# Altium PCB PCB1.PcbDoc
Units mm, origin at the board's own origin, x right, y up, seen from the top; angles counter-clockwise.
Board outline 120.01 x 34 mm, 2 copper layers (Top Layer, Bottom Layer); 71 components, 74 nets, 283 pads, 60 vias.
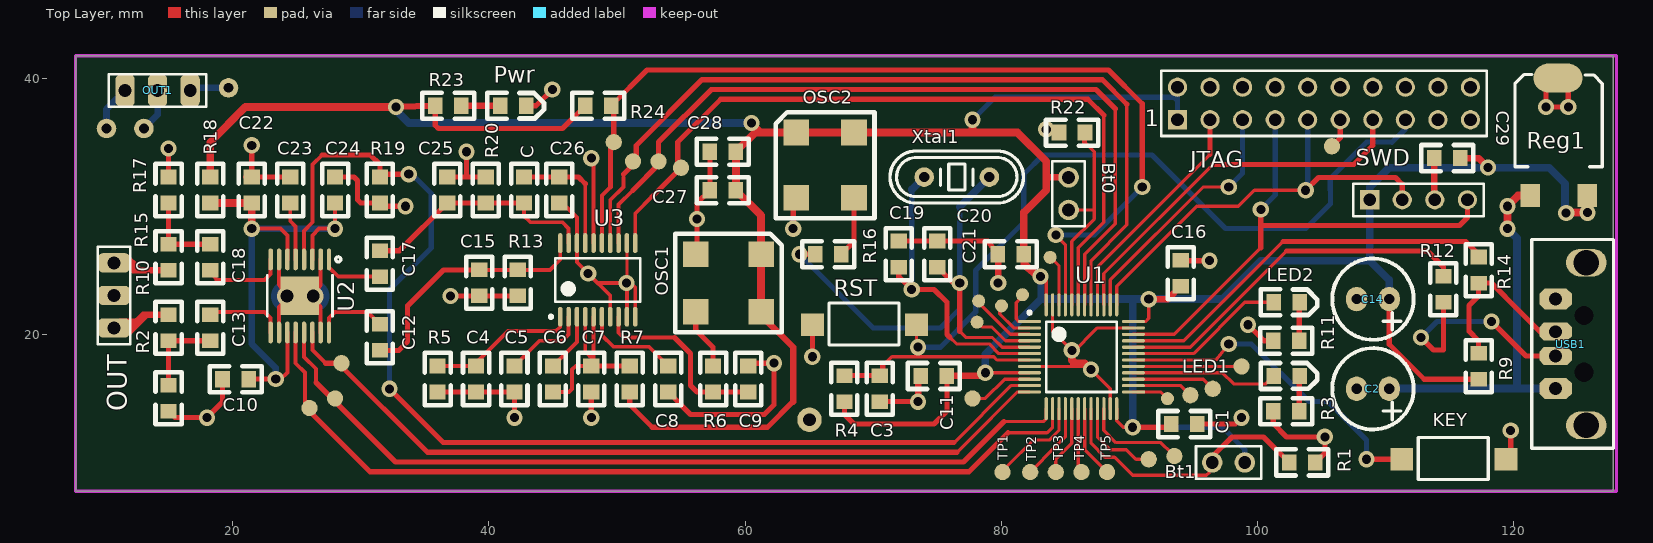
[diagram p0: Top Layer view]
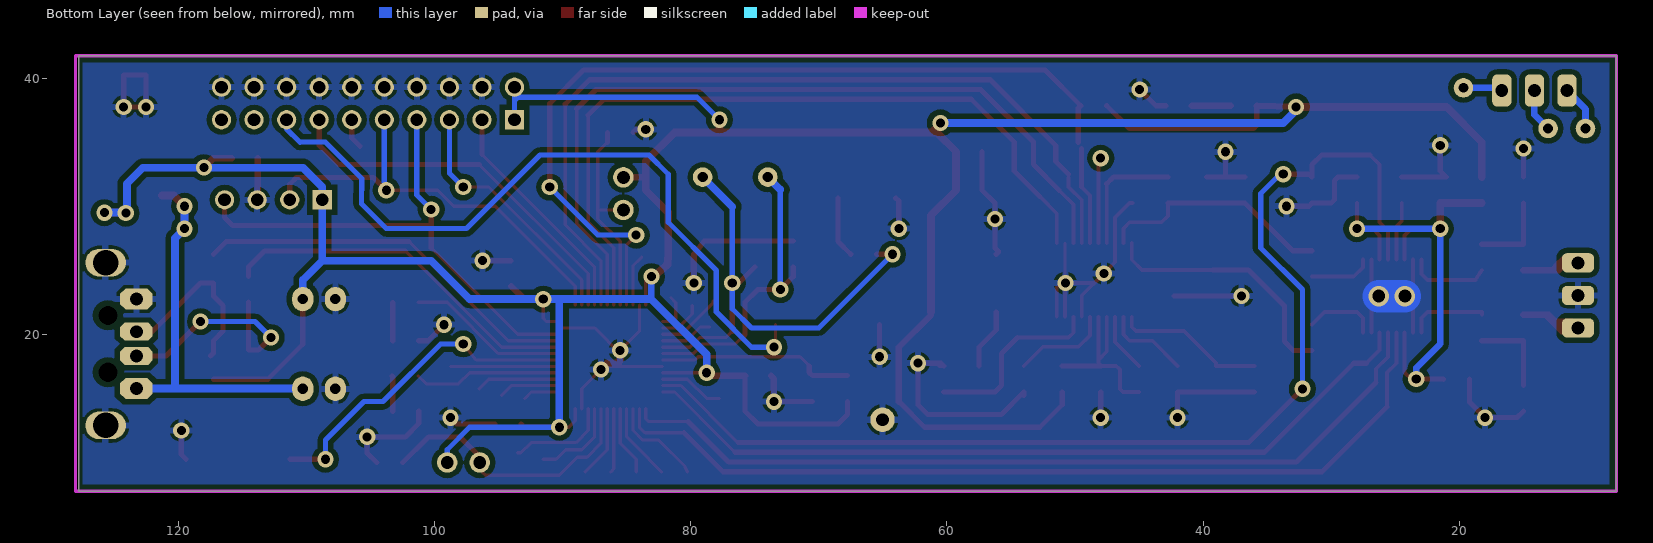
[diagram p1: Bottom Layer view, seen from below]

## Layer stack, top to bottom
Top Solder: solder mask 0.0102, Solder Resist, Dk 3.5
Top Layer: signal copper 0.0356
Dielectric 1: dielectric 0.32, FR-4, Dk 4.8
Bottom Layer: signal copper 0.0356
Bottom Solder: solder mask 0.0102, Solder Resist, Dk 3.5

## Board outline
7.75,7.75 7.75,41.75 127.762,41.75 127.762,7.75 7.75,7.75

## Design rules (kind name [scope] priority, off if disabled: settings)
Clearance [All] p1: gap=0.406 except(0.203: Track-SMDPad Track-Track SMDPad-SMDPad)
MinimumSolderMaskSliver [All] p1: minsoldermaskwidth=0
PolygonConnect [All] p1: connectstyle=Relief reliefconductorwidth=0.508 reliefentries=4 polygonreliefangle="90 Angle" airgapwidth=0.254
RoutingVias [All] p1: holewidth=0.711 width=1.27 viastyle="Through Hole" minholewidth=0.711 minwidth=1.27 maxholewidth=0.711 maxwidth=1.27
SilkToSilkClearance [All] p1: silktosilkclearance=0
SilkToSolderMaskClearance [IsPad] p1: minsilkscreentomaskgap=0 clearancetoexposedcopper=TRUE
SolderMaskExpansion [All] p1: expansion=0.102
UnpouredPolygon [All] p1: allowunpoured=FALSE
Width [All] p1: maxlimit=2.54 minlimit=0.254 preferedwidth=0.254
26 further rules are at their usual default settings.

## Components (designator, comment, footprint, x,y, rotation, side; value= is the part's Value field where it differs from the comment)
Bt0 "Comment" HDR1X2 85.25,32.25 r270 top
Bt1 "Comment" HDR1X2 99,10 r180 top
C "100nF" SMD0805 42.75,30.25 r90 top
C1 "Comment" SMD0805 93.25,13 r0 top
C2 "Comment" CAP_1.0 109,15.75 r180 top
C3 "Comment" SMD0805 70.5,14.75 r90 top
C4 "10nF" SMD0805 39,15.5 r90 top
C5 "10nF" SMD0805 42,15.5 r90 top
C6 "10nF" SMD0805 45,15.5 r90 top
C7 "100nF" SMD0805 48,15.5 r90 top
C8 "100nF" SMD0805 54,15.5 r90 top
C9 "15pF" SMD0805 60.25,15.5 r90 top
C10 "Comment" SMD0805 21.25,16.5 r180 top
C11 "Comment" SMD0805 75.75,16.75 r180 top
C12 "Comment" SMD0805 31.5,18.75 r90 top
C13 "Comment" SMD0805 18.25,19.5 r90 top
C14 "Comment" CAP_1.0 109,22.75 r180 top
C15 "22pF" SMD0805 39.25,23 r90 top
C16 "Comment" SMD0805 94,23.75 r90 top
C17 "Comment" SMD0805 31.5,24.5 r90 top
C18 "Comment" SMD0805 18.25,25 r90 top
C19 "Comment" SMD0805 72,25.25 r90 top
C20 "Comment" SMD0805 75,25.25 r90 top
C21 "Comment" SMD0805 81.75,26.25 r180 top
C22 "Comment" SMD0805 21.5,30.25 r90 top
C23 "Comment" SMD0805 24.5,30.25 r90 top
C24 "Comment" SMD0805 28,30.25 r90 top
C25 "22pF" SMD0805 36.75,30.25 r90 top
C26 "100pF" SMD0805 45.5,30.25 r90 top
C27 "Comment" SMD0805 57.25,31.25 r0 top
C28 "Comment" SMD0805 57.25,34.25 r0 top
C29 "Comment" SMD0805 113.793,33.762 r0 top
JTAG "Comment" HDR2X10 93.75,36.75 r0 top
KEY "Comment" MicroSW_smd 111.25,10.25 r0 top
LED1 "Comment" LED805 101.25,16.75 r0 top
LED2 "Comment" LED805 101.25,22.5 r0 top
OSC1 "Comment" OSC 61.25,26.25 r180 top
OSC2 "Comment" OSC 64,35.75 r270 top
OUT "Comment" HDR1X3 10.75,20.5 r90 top
OUT1 "Comment" HDR1X3 11.61,39.034 r0 top
Pwr "Comment" LED805 40.894,37.846 r0 top
R1 "Comment" SMD0805 104.5,10 r180 top
R2 "Comment" SMD0805 15,14 r90 top
R3 "Comment" SMD0805 103.25,14 r180 top
R4 "Comment" SMD0805 67.75,14.75 r90 top
R5 "6K8" SMD0805 36,15.5 r90 top
R6 "100R" SMD0805 57.5,15.5 r90 top
R7 "10R" SMD0805 51,15.5 r90 top
R9 "1K5" SMD0805 117.25,16.5 r90 top
R10 "Comment" SMD0805 15,19.5 r90 top
R11 "Comment" SMD0805 103.25,19.5 r180 top
R12 "22R" SMD0805 114.5,22.5 r90 top
R13 "220R" SMD0805 42.25,23 r90 top
R14 "22R" SMD0805 117.25,24 r90 top
R15 "Comment" SMD0805 15,25 r90 top
R16 "Comment" SMD0805 67.5,26.25 r180 top
R17 "Comment" SMD0805 15,30.25 r90 top
R18 "Comment" SMD0805 18.25,30.25 r90 top
R19 "Comment" SMD0805 31.5,30.25 r90 top
R20 "220R" SMD0805 39.75,30.25 r90 top
R22 "Comment" SMD0805 84.5,35.75 r0 top
R23 "Comment" SMD0805 35.814,37.846 r0 top
R24 "Comment" SMD0805 47.522,37.847 r0 top
Reg1 "Comment" DPAK 123.5,40.25 r0 top
RST "Comment" MicroSW_smd 65.25,20.75 r0 top
SWD "Comment" HDR1X4 108.75,30.5 r0 top
U1 "Comment" STM-LQFP48_N 86.25,18.25 r0 top
U2 "Comment" ADI-RE-16-2_N 25.25,23 r270 top
U3 "Comment" ADI-RU-20_N 48.5,24.25 r90 top
USB1 "Comment" usb_female 123.25,19.25 r90 top
Xtal1 "Comment" XTAL2 75.25,30.75 r0 top

## Footprints (in the part's own frame and the unit in brackets; to place one, negate y for a bottom-side part, rotate by r counter-clockwise, add the part's x,y. Pads: shape width x height; smd on the part's side, far side on the other; paste and mask are expansions set on the pad)
ADI-RE-16-2_N [mm] "TSOP, 16-Leads, Body 5x4.4mm, Pitch 0.65mm, Thermal Pad, IPC Medium Density"
  rect 3x3 smd paste-1.5: 17(0,0)
  oval 1.7x0.35 smd: CLK(2.85,0.325) Data(2.85,0.975) ICOM(-2.85,1.625) ICOM(2.85,1.625) IN+(-2.85,2.275) IN-(2.85,2.275) Latch(2.85,-0.325) OCM(2.85,-1.625) OCOM(-2.85,-1.625) OUT+(-2.85,-2.275) OUT-(2.85,-2.275) PwUp(-2.85,0.325) VCCI(-2.85,0.975) VCCO(-2.85,-0.975) VCCO(2.85,-0.975) VOCM(-2.85,-0.325)
  silkscreen extent -3.05,-2.55 1.6,3.2, body extent -2.25,-2.55 2.25,2.55, height 1.2
ADI-RU-20_N [mm] "SOP, 20-Leads, Body 6.5x4.4mm, Pitch 0.65mm, IPC Medium Density"
  oval 1.55x0.35 smd: AGND(2.875,1.625) AVdd(-2.875,0.975) Cap(-2.875,-0.325) Comp(-2.875,1.625) DGND(-2.875,-0.975) DVdd(-2.875,0.325) Fadj(-2.875,2.925) Fsel(-2.875,-2.275) Fsync(2.875,-0.325) Iout(2.875,2.275) IoutB(2.875,2.925) MCLK(-2.875,-1.625) Psel(-2.875,-2.925) RefOut(-2.875,2.275) Reset(2.875,-2.925) SCLK(2.875,-0.975) Sdata(2.875,-1.625) Sign(2.875,0.325) Sleep(2.875,-2.275) Vin(2.875,0.975)
  silkscreen extent -3,-3.3 1.7,3.77, body extent -2.25,-3.3 2.25,3.3, height 1.2
CAP_1.0 [mm]
  oval 1.651x1.905 hole 0.8: 2(-1.27,0) 3(1.27,0)
  silkscreen extent -3.17,-3.17 3.17,3.17
DPAK [mil]
  oval 150x90 smd: 0(-2.2,-9.65)
  rect 60x70 smd: In(-88,-371) Out(88,-371)
  silkscreen extent -134,-282 134,1
HDR1X2 [mm] "Connector; Header; 2 Position"
  round 1.6 hole 1: 1(0,0) 2(2.54,0)
  silkscreen extent -1.27,-1.27 3.81,1.27
HDR1X3 [mm] "Connector; Header; 3 Position"
  rrect50% 1.5x2.5 hole 1: 1(0,0) 2(2.54,0) 3(5.08,0)
  silkscreen extent -1.27,-1.27 6.35,1.27
HDR1X4 [mm] "Connector; Header; 4 Position"
  round 1.5 hole 1: GND(5.08,0) SWCLK(2.54,0) SWDIO(7.62,0)
  rect 1.5x1.5 hole 1: VDD(0,0)
  silkscreen extent -1.27,-1.27 8.89,1.27
HDR2X10 [mm] "Connector; Header; 10x2 Position"
  round 1.5 hole 1: 4(2.54,2.54) 6(5.08,2.54) 8(7.62,2.54) 10(10.16,2.54) 11(12.7,0) 12(12.7,2.54) 14(15.24,2.54) 16(17.78,2.54) 17(20.32,0) 18(20.32,2.54) 19(22.86,0) 20(22.86,2.54) NRST(17.78,0) TCLK(10.16,0) TDI(5.08,0) TDO(15.24,0) TMS(7.62,0) TRST(2.54,0) Vcc(0,2.54)
  rect 1.5x1.5 hole 1: Vcc(0,0)
  silkscreen extent -1.27,-1.27 24.13,3.81
LED805 [mil]
  rect 45x50 smd: 0(0,0) 0(80,0)
  silkscreen extent -40,-40 134,40
MicroSW_smd [mil]
  rect 70x70 smd: 1(0,0) 2(320,0)
  silkscreen extent 51,-62 266,67
OSC [mm]
  rect 2x2 smd: En(0,0) Gnd(5.1,0) Out(5.1,4.5) Vdd(0,4.5)
  silkscreen extent -1.6,-1.6 6.7,6.1
SMD0805 [mil]
  rect 45x50 smd: 0(0,0) 0(80,0)
  silkscreen extent -40,-40 120,40
STM-LQFP48_N [mm] "QFP, 48-Leads, Body 7x7mm, Pitch 0.5mm, IPC Medium Density"
  oval 0.25x1.8 smd: BOOT0(-0.75,4.05) PA3(-2.75,-4.05) PA4(-2.25,-4.05) PA5(-1.75,-4.05) PA6(-1.25,-4.05) PA7(-0.75,-4.05) PA14-JTCK-SWCLK(2.75,4.05) PA15-JTDI(2.25,4.05) PB0(-0.25,-4.05) PB1(0.25,-4.05) PB2-Boot1(0.75,-4.05) PB3-TDO(1.75,4.05) PB4-JTRST(1.25,4.05) PB5(0.75,4.05) PB6(0.25,4.05) PB7(-0.25,4.05) PB8(-1.25,4.05) PB9(-1.75,4.05) PB10(1.25,-4.05) PB11(1.75,-4.05) VDD_1(2.75,-4.05) VDD_3(-2.75,4.05) VSS_1(2.25,-4.05) VSS_3(-2.25,4.05)
  oval 1.8x0.25 smd: NRST(-4.05,-0.25) PA0-WKUP(-4.05,-1.75) PA1(-4.05,-2.25) PA2(-4.05,-2.75) PA8-MCO(4.05,-0.75) PA9(4.05,-0.25) PA10(4.05,0.25) PA11-USBDM(4.05,0.75) PA12-USBDP(4.05,1.25) PA13-TMS-SWDIO(4.05,1.75) PB12(4.05,-2.75) PB13(4.05,-2.25) PB14(4.05,-1.75) PB15(4.05,-1.25) PC13-Tamper-RTC(-4.05,2.25) PC14-OSC32_IN(-4.05,1.75) PC15-OSC32_OUT(-4.05,1.25) PD0-OSC_IN(-4.05,0.75) PD1-OSC_OUT(-4.05,0.25) VBAT(-4.05,2.75) VDD_2(4.05,2.75) VDDA(-4.05,-1.25) VSS_2(4.05,2.25) VSSA(-4.05,-0.75)
  silkscreen extent -4.17,-2.75 2.75,3.57, body extent -3.5,-3.5 3.5,3.5, height 1.6
usb_female [mil]
  oval 85x125 hole 78.74: 4(249.75,-94.75) 5(-250.25,-94.75)
  round 20 hole 59.06: 6(87.75,-87.75) 7(-87.25,-87.75)
  oct 55x100 hole 39.37: D+(37.75,-0.25) D-(-37.25,-0.25)
  oct 65x100 hole 39.37: G(137.75,-0.25) VCC(-137.25,-0.25)
  silkscreen extent -320,-178 321,73
XTAL2 [mil]
  round 60 hole 31.5: 1(-50,60) 2(150,60)
  silkscreen extent -155,-20 255,140

## Part data
OUT OUT1: library part "Header 3"
U1: library part STM32F103C8T6
U2: library part AD8370AREZ
U3: library part AD9834BRUZ

## Free pads (board coordinates)
  round 1.524 hole 0.762: 0(19.685,39.243) 1(13.081,36.068) 2(10.16,36.068)
  round 1.27 smd: 0(26,14.25) 0(28,15) 0(28.5,17.75) 0(49.75,35) 0(51.25,33.5) 0(53.25,33.5) 0(55,33) 0(77.75,15) 0(80.091,9.25) 0(82.25,9.25) 0(84.25,9.25) 0(86.25,9.25) 0(88.25,9.25) 0(91.5,10.25) 0(93.5,10.5) 0(94.75,15.25) 0(96.5,15.75) 0(98.75,17.5) 0(105.799,34.681)
  round 1.016 smd: 0(78.105,20.955) 0(78.232,22.606) 0(80.01,22.225) 0(81.647,23.093) 0(83.806,26.014) 0(92.964,14.986)
  round 1.905 hole 1: 3(65.024,13.335)

## Via types
v1: diameter 1.27, hole 0.711, Top Layer to Bottom Layer, 58 vias
v2: diameter 1.6, hole 1, Top Layer to Bottom Layer, 2 vias

## Nets (pads, with @x,y where several pads share a name; then routed paths per layer and width w, separated by ;. In a path a pad name is that pad's centre, name@x,y a point inside that pad or via, vN(x,y) a via of type N, cw(c..) or ccw(c..) an arc to the next point about the centre after c; other vN are vias at no path point)
GND: C1.0@95.282,13 C2.3 C3.0@70.5,14.75 C4.0@39,15.5 C5.0@42,15.5 C7.0@48,15.5 C8.0@54,15.5 C9.0@60.25,17.532 C10.0@19.218,16.5 C11.0@73.718,16.75 C14.3 C15.0@39.25,23 C16.0@94,25.782 C19.0@72,27.282 C20.0@75,27.282 C21.0@79.718,26.25 C22.0@21.5,32.282 C23.0@24.5,32.282 C24.0@28,32.282 C25.0@36.75,32.282 C26.0@45.5,30.25 C27.0@57.25,31.25 C28.0@57.25,34.25 C29.0@113.793,33.762 JTAG.4 JTAG.6 JTAG.8 JTAG.10 JTAG.12 JTAG.14 JTAG.16 JTAG.18 JTAG.20 KEY.2 OSC1.Gnd OSC2.Gnd OUT.2 pad.3 Pwr.0@42.926,37.846 R1.0@104.5,10 R2.0@15,14 R3.0@101.218,14 R5.0@36,15.5 R11.0@101.218,19.5 R13.0@42.25,23 R17.0@15,32.282 R19.0@31.5,30.25 R20.0@39.75,32.282 R22.0@84.5,35.75 Reg1.0 RST.1 SWD.GND U1.VSS_1 U1.VSS_2 U1.VSS_3 U1.VSSA U2.17 U2.ICOM U2.OCM U2.OCOM U3.AGND U3.DGND U3.Fsel U3.Psel U3.Sleep USB1.4 USB1.5 USB1.G | length 179.9
  Top Layer w0.254: v1@50.775,24.025 U3.Sleep ; U1.VSSA 86.75,17.5 88.5,15.75 U1.VSS_1 U1.VSS_1@88.5,15 ; U1.VSS_3 84,20.25 v1(85.5,18.75) v1@85.5,18.5 ; 85.5,17.5 v1@85.5,18.5 ; U1.VSS_2 87.5,20.5 v1@85.5,18.5
  Top Layer w0.305: U2.OCM 23.625,22.125 v2(24.257,22.987) 23.625,23.875 U2.OCOM ; U2.ICOM@26.875,20.15 26.875,22.125 v2(26.289,22.987) 26.875,23.875 U2.ICOM@26.875,25.85 ; C26.0@45.5,30.25 45.75,30.25 46.875,29.125 U3.AGND 46.875,25.625 v1(47.75,24.75) 49.475,23.025 U3.DGND ; 48.5,24 v1(50.75,24) v1@50.775,24.025 ; U3.Fsel v1@50.775,24.025 ; U3.Psel 51.425,23.675 51.075,24.025 v1@50.775,24.025
  Top Layer w0.406: R2.0@15,14 15.5,13.5 v1(18,13.5) 19.218,14.718 C10.0@19.218,16.5 ; R17.0@15,32.282 v1(15,34.5) ; v1(21.5,34.75) 21.5,32.75 21.032,32.282 21.5,32.282 C23.0@24.5,32.282 ; C24.0@28,32.282 29.468,32.282 29.75,32 29.75,30.5 30,30.25 31.5,30.25 31.75,30 v1(33.5,30) ; R5.0@36,15.5 39,15.5 42,15.5 v1(42,13.5) ; C25.0@36.75,32.282 38.25,32.282 ; v1(37,23) 39.25,23 R13.0@42.25,23 ; v1(38.25,34.25) 38.25,32.282 ; R20.0@39.75,32.282 38.25,32.282 ; Pwr.0@42.926,37.846 43.688,37.846 v1(44.958,39.116) ; v1(48,13.5) C7.0@48,15.5 ; C8.0@54,15.25 54,15.5 55.75,13.75 61.5,13.75 62.25,14.5 v1(62.25,17.75) 60.468,17.75 60.25,17.532 C9.0@60.554,17.587 ; OSC1.Gnd 56,26.4 56,26.5 56.25,26.75 v1(56.25,29) 56.25,30.25 57.25,31.25 C28.0@57.25,34.25 ; v1(63.75,28.25) 63.75,30.4 OSC2.Gnd ; v1(65.25,18.25) RST.1 ; C3.0@70.5,14.75 v1(73.5,14.75) ; C19.0@72,27.282 75,27.282 78.936,27.282 C21.0@79.718,26.25 ; v1(83.5,36) 84.25,36 R22.0@84.5,35.75 ; C16.0@94.032,25.75 v1(96.25,25.75) ; C1.0@95.282,13 98.25,13 v1(98.75,13.5) ; v1(99.25,20.75) 100.5,19.5 R11.0@101.218,19.5 ; R3.0@101.218,14 101.218,13.032 102.25,12 v1(105.25,12) 105.25,10.75 R1.0@104.5,10 ; KEY.2 119.75,10.622 v1(119.75,12.5) ; v1(122.5,37.75) v1(124.25,37.75) 124.25,40.25 122.5,40.25 v1(122.5,37.75)
  Top Layer w0.508: v1(73.5,14.75) 73.5,16.532 C11.0@73.718,16.75 ; C21.0@79.718,26.25 79.75,26.032 v1(79.75,24) ; C29.0@113.793,33.762 113.793,30.537 SWD.GND
  Top Layer w0.61: v1(85.5,18.75) 85.5,18 85.75,17.75 86.5,17.75 v1(87,17.25)
  Bottom Layer w2.54: v2(24.257,22.987) v2(26.289,22.987)
NewNet1: C9.0@60.25,15.5 R6.0@57.5,15.5 U3.MCLK | length 14.8
  Top Layer w0.305: U3.MCLK 50.125,20.125 50.5,19.75 54.5,19.75
  Top Layer w0.406: 54.5,19.75 55.75,18.5 55.75,16 56.25,15.5 57.5,15.5 C9.0@60.25,15.5
NewNet2: C18.0@18.25,27.032 R15.0@15,27.032 R17.0@15,30.25 | length 6.5
  Top Layer w0.406: R17.0@15,30.25 15,27.032 C18.0@18.25,27.032
NewNet3: C13.0@18.25,19.5 R2.0@15,16.032 R10.0@15,19.5 | length 6.7
  Top Layer w0.406: R2.0@15,16.032 15,19.5 C13.0@18.25,19.5
NewNet4: OUT.1 R10.0@15,21.532 | length 11.3
  Top Layer w0.508: OUT.1 12.25,20.5 13,21.25 ; OUT.1@11,20.25 12,20.25 13,21.25 ; OUT.1@11.25,20.75 11.5,20.5 12,20.5 13.032,21.532 13.282,21.532 ; OUT.1@11.25,21 12.5,21 12.75,21.25 ; R10.0@15,21.532 13.282,21.532 ; 13,21.25 13.282,21.532
NewNet5: OUT.3 R15.0@15,25 | length 7.8
  Top Layer w0.508: OUT.3 12.17,25.58 12.75,25 ; OUT.3@11.25,25.5 11.75,25.5 12.25,25 12.75,25 ; OUT.3@11.25,26 11.75,26 12.5,25.25 ; R15.0@15,25 12.75,25
NewNet6: Pwr.0@40.894,37.846 R23.0@37.846,37.846 | length 3
  Top Layer w0.508: R23.0@37.846,37.846 Pwr.0@40.894,37.846
NewNet7: Bt0.1 Bt1.1 C1.0@93.25,13 C11.0@75.75,16.75 C14.2 C16.0@94,23.75 C21.0@81.75,26.25 C27.0@59.282,31.25 C28.0@59.282,34.25 C29.0@115.825,33.762 JTAG.Vcc OSC1.En OSC1.Vdd OSC2.En OSC2.Vdd R4.0@67.75,14.75 R7.0@51,15.5 R9.0@117.25,16.5 R18.0@18.25,32.282 R23.0@35.814,37.846 R24.0@47.522,37.847 Reg1.Out SWD.VDD U1.VDD_1 U1.VDD_2 U1.VDD_3 U1.VDDA | length 295.6
  Top Layer w0.254: v1(78.75,17) U1.VDDA ; U1.VDD_3 v1@83.5,24.5 ; U1.VDD_1 89,13.25 89.5,12.75 v1(90.25,12.75) ; U1.VDD_2 91.25,21 91.5,21.25 v1(91.5,22.75)
  Top Layer w0.406: R23.0@35.814,37.846 35.814,36.322 36.068,36.068 45.743,36.068 R24.0@47.522,37.847 ; R7.0@51,15.5 51,14.5 52.75,12.75 61.75,12.75 63.75,14.75 ; OSC1.Vdd@61.25,21.5 OSC1.Vdd ; R4.0@67.75,14.75 67.75,13.75 68.5,13 74.75,13 75.75,14 C11.0@75.75,16.75 ; v1(90.25,12.75) 93,12.75 C1.0@93.25,13 ; C14.2 110.27,19.23 113,16.5 114.5,16.5 R9.0@117.25,16.5
  Top Layer w0.508: v1(32.75,37.75) R23.0@35.814,37.846 ; v1(60.5,36.5) 61.25,35.75 ; OSC1.Vdd@61.25,21.5 63.75,19 63.75,14.75 ; C11.0@75.75,16.75 78.5,16.75 v1(78.75,17) ; 83.5,32.375 83.625,32.25 Bt0.1 ; v1(91.5,22.75) 93,22.75 C16.0@94,23.75 ; C29.0@115.825,33.762 117.241,33.762 v1(117.983,33.02)
  Top Layer w0.61: R18.0@18.25,32.282 18.25,35 21,37.75 v1(32.75,37.75) ; OSC1.Vdd OSC1.En 61.25,29.282 59.282,31.25 59.282,34.25 60.782,35.75 ; 61.25,35.75 60.782,35.75 ; 77.75,35.75 v1(77.75,36.75) ; v1@82.993,24.422 81.813,25.433 81.75,26.25 81.75,29.5 83.5,31.25 83.5,33.5 81.25,35.75 OSC2.Vdd OSC2.En 60.782,35.75 ; v1(124.079,29.464) 124.115,29.5 v1(125.75,29.5)
  Bottom Layer w0.406: v1(77.75,36.75) 79.5,38.5 93.477,38.5 93.75,38.227 ; v1(90.25,12.75) 97.25,12.75 99,11 Bt1.1 ; JTAG.Vcc@93.75,36.75 93.75,38.227 ; JTAG.Vcc@93.75,39.29 93.75,38.227
  Bottom Layer w0.508: v1(83.058,24.511) 83.058,22.767 83.075,22.75
  Bottom Layer w0.61: v1@32.5,37.75 33.75,36.5 v1(60.5,36.5) ; v1(78.75,17) 78.75,18.425 83.075,22.75 v1(91.5,22.75) 97.25,22.75 100.25,25.75 108.75,25.75 ; v1(90.25,12.75) 90.25,22.75 ; C14.2 110.27,24.23 108.75,25.75 ; v1(125.75,29.5) 124.25,29.5 124,29.25 124,31.75 122.75,33 110.25,33 108.75,31.5 SWD.VDD 108.75,25.75
NewNet8: LED1.0@103.282,16.75 R3.0@103.25,14 | length 2.8
  Top Layer w0.406: R3.0@103.25,14 103.25,16.718 LED1.0@103.282,16.75
NewNet9: LED2.0@103.282,22.5 R11.0@103.25,19.5 | length 3
  Top Layer w0.254: LED2.0@103.25,22.468 LED2.0@103.282,22.5
  Top Layer w0.406: R11.0@103.25,19.5 LED2.0@103.25,22.468
NewNet10: Bt1.2 R1.0@102.468,10 U1.PB2-Boot1 | length 21
  Top Layer w0.254: U1.PB2-Boot1 87,11.5 88.086,10.414 88.836,10.414 90.25,9 96,9 Bt1.2@96.25,9.25
  Top Layer w0.406: Bt1.2 96.46,10.46 98,12 100.468,12 R1.0@102.468,10
NewNet11: R12.0@114.5,22.5 USB1.D- | length 18
  Top Layer w0.406: v1(112.75,19.75) 113.718,18.782 114.5,18.782 R12.0@114.5,22.5 ; v1(118.25,21) 120.946,18.304 USB1.D-
  Bottom Layer w0.406: v1(112.75,19.75) 114,21 v1(118.25,21)
NewNet12: R12.0@114.5,24.532 U1.PA11-USBDM | length 28.5
  Top Layer w0.254: U1.PA11-USBDM 94.75,19 102.25,26.5
  Top Layer w0.406: 102.25,26.5 113.25,26.5 114.5,25.25 R12.0@114.5,24.532
NewNet13: R9.0@117.25,18.532 R14.0@117.25,24 USB1.D+ | length 14
  Top Layer w0.406: R9.0@117.478,18.304 117.25,18.532 117.25,19.5 116.5,20.25 116.5,22.25 117.25,23 117.25,24 118.25,24 120.5,21.75 122.041,20.209 USB1.D+
NewNet14: R14.0@117.25,26.032 U1.PA12-USBDP | length 30.6
  Top Layer w0.254: U1.PA12-USBDP 94.25,19.5 102,27.25
  Top Layer w0.406: 102,27.25 116.25,27.25 R14.0@117.25,26.25
NewNet15: Bt0.2 R22.0@86.532,35.75 U1.BOOT0 | length 17.6
  Top Layer w0.254: Bt0.2 Bt0.2@85.96,29.71 ; U1.BOOT0 85.5,27.25 87.25,29 87.25,29.718 ; Bt0.2@85.55,29.3 Bt0.2@85.96,29.71 ; 86.5,35 87.25,34.25 87.25,29.718 ; Bt0.2@85.96,29.71 87.242,29.71 87.25,29.718
  Top Layer w0.406: Bt0.2 Bt0.2@85.55,29.3 ; 86.5,35 R22.0@86.5,35.75
NewNet16: C20.0@75,25.25 R16.0@65.468,26.25 U1.PD0-OSC_IN Xtal1.2 | length 39.6
  Top Layer w0.254: 76.75,20.25 77.25,19.75 79.31,19.75 80.06,19 U1.PD0-OSC_IN
  Top Layer w0.406: v1(64.25,26.25) R16.0@65.468,26.25 ; C20.0@75,25.25 76.75,23.5 76.75,20.25
  Bottom Layer w0.406: v1(64.25,26.25) 70,20.5 75.25,20.5 76.75,22 v1(76.75,24) 76.75,29.964
  Bottom Layer w0.61: 76.75,29.964 Xtal1.2
NewNet17: OSC2.Out R16.0@67.5,26.25 | length 4.8
  Top Layer w0.406: R16.0@67.5,26.25 68.5,27.25 OSC2.Out
NewNet18: C19.0@72,25.25 U1.PD1-OSC_OUT Xtal1.1 | length 24.1
  Top Layer w0.254: 76,19.75 76.5,19.25 79.048,19.25 79.798,18.5 U1.PD1-OSC_OUT
  Top Layer w0.406: C19.0@72,25.25 72,24.5 v1(73,23.5) 74.75,23.5 75.75,22.5 75.75,20 76,19.75
  Bottom Layer w0.406: v1(73,23.5) 73,31.294
  Bottom Layer w0.61: 73,31.294 Xtal1.1
NewNet19: C3.0@70.5,16.782 JTAG.NRST R4.0@67.75,16.782 RST.2 U1.NRST | length 73.9
  Top Layer w0.254: 70.75,17.537 71.463,18.25 79.401,18.25 79.651,18 U1.NRST ; 73.25,18.25 73.378,18.378 RST.2
  Top Layer w0.406: R4.0@67.75,16.782 70.5,16.782 70.75,17.032 70.75,17.537
  Bottom Layer w0.406: v1(73.5,19) 75.25,19 77.995,21.745 77.995,24.995 81.75,28.75 81.75,32.5 83.25,34 91.75,34 97.5,28.25 103.75,28.25 105.695,30.195 105.668,32.168 108.517,35.017 110.49,34.99 111.53,36.03 JTAG.NRST
NewNet20: C2.2 Reg1.In USB1.VCC | length 31.4
  Top Layer w0.61: v1(119.5,28.25) v1(119.5,30) 120.327,30.827 Reg1.In
  Bottom Layer w0.61: C2.2 110.284,15.764 USB1.VCC ; v1(119.5,30) v1(119.5,28.25) 120.25,27.5 120.25,15.764
NewNet21: LED1.0@101.25,16.75 U1.PB15 | length 11.6
  Top Layer w0.254: U1.PB15 95.906,17 95.908,17.002 96.285,17.002 96.287,17 97.25,17 98.121,16.129 100.629,16.129 LED1.0@101.25,16.75
NewNet22: LED2.0@101.25,22.5 U1.PA10 | length 12.6
  Top Layer w0.254: U1.PA10 95,18.5 99,22.5 LED2.0@101.25,22.5
NewNet23: KEY.1 U1.PA9 | length 26.2
  Top Layer w0.254: U1.PA9 96.75,18 v1(97.75,19.25)
  Top Layer w0.406: v1(108.5,10.25) KEY.1
  Bottom Layer w0.406: v1(97.75,19.25) 99.5,19.25 104,14.75 105.5,14.75 108.5,11.75 v1(108.5,10.25)
NewNet24: C10.0@21.25,16.5 C22.0@21.5,30.25 C24.0@28,30.25 R18.0@18.25,30.25 U2.VCCI U2.VCCO | length 41
  Top Layer w0.305: v1(21.5,28.25) 23.75,28.25 24.275,27.725 U2.VCCO@24.275,25.85 ; v1@23.75,16.5 24.275,17.025 U2.VCCO@24.275,20.15 ; U2.VCCI 26.225,27.725 26.75,28.25 v1(28,28.25) C24.0@28,30.25
  Top Layer w0.406: C10.0@21.25,16.5 21.26,16.51 v1(23.368,16.51)
  Top Layer w0.61: R18.0@18.25,30.25 21.5,30.25 v1(21.5,28.25)
  Bottom Layer w0.508: v1(23.368,16.51) 23.368,17.382 21.5,19.25 v1(21.5,28.25) v1(28,28.25)
NewNet25: pad.0@49.75,35 R24.0@49.554,37.847 U1.PB8 U3.Fsync | length 74.8
  Top Layer w0.254: v1(84.25,27.75) 85,27 U1.PB8
  Top Layer w0.305: U3.Fsync 48.825,30.825 49.5,31.5
  Top Layer w0.406: 49.5,31.5 pad.0@49.5,34.5 ; pad.0@49.75,35 49.75,37.651 49.554,37.847 52.347,40.64 55.64,40.64 88.36,40.64 91,38 v1(91,31.5)
  Bottom Layer w0.406: v1(84.25,27.75) 87.25,27.75 v1(91,31.5)
NewNet26: pad.0@55,33 U1.PB7 U3.Reset | length 60
  Top Layer w0.254: U1.PB7 86,26.75 88,28.75 88,37.095
  Top Layer w0.305: U3.Reset 51.425,29.425 52.75,30.75
  Top Layer w0.406: 52.75,30.75 54.75,32.75 54.75,35 58.104,38.354 86.741,38.354 88,37.095
NewNet27: pad.0@53.25,33.5 U1.PB6 U3.Sdata | length 63.4
  Top Layer w0.254: U1.PB6 86.5,26.25 88.89,28.64 88.89,37.59 88.9,37.6
  Top Layer w0.305: U3.Sdata 50.125,30.125 51.25,31.25
  Top Layer w0.406: 51.25,31.25 53.25,33.25 53.25,35 57.366,39.116 87.384,39.116 88.9,37.6
NewNet28: pad.0@51.25,33.5 U1.PB5 U3.SCLK | length 66.2
  Top Layer w0.254: U1.PB5 87,25.75 89.789,28.539 89.789,36.539 89.789,37.961
  Top Layer w0.305: U3.SCLK 49.475,30.475 50.5,31.5 50.5,32.25
  Top Layer w0.406: 50.5,32.5 51.5,33.5 51.5,34.75 56.628,39.878 87.872,39.878 89.789,37.961
NewNet29: JTAG.TRST U1.PB4-JTRST | length 18.1
  Top Layer w0.254: U1.PB4-JTRST 87.5,25.25 96.29,34.04
  Top Layer w0.406: 96.29,34.04 JTAG.TRST
NewNet30: JTAG.TDO U1.PB3-TDO | length 29.6
  Top Layer w0.254: U1.PB3-TDO 88,24.75 96.5,33.25
  Top Layer w0.406: 96.5,33.25 107.5,33.25 108.99,34.74 JTAG.TDO
NewNet31: JTAG.TDI U1.PA15-JTDI | length 19.9
  Top Layer w0.254: U1.PA15-JTDI 88.5,24.25 95.75,31.5 v1(97.75,31.5)
  Bottom Layer w0.406: v1(97.75,31.5) 98.83,32.58 JTAG.TDI
NewNet32: JTAG.TCLK SWD.SWCLK U1.PA14-JTCK-SWCLK | length 33.8
  Top Layer w0.254: U1.PA14-JTCK-SWCLK 89,23.75 95.25,30 98.5,30 99.75,31.25 v1(103.75,31.25)
  Top Layer w0.406: v1(103.75,31.25) 104.75,32.25 110.75,32.25 111.29,31.71 SWD.SWCLK
  Bottom Layer w0.254: v1@103.75,31.75 103.91,31.91
  Bottom Layer w0.406: 103.91,31.91 JTAG.TCLK
NewNet33: JTAG.TMS SWD.SWDIO U1.PA13-TMS-SWDIO | length 41
  Top Layer w0.254: U1.PA13-TMS-SWDIO 93.5,20 100.25,26.75
  Top Layer w0.406: 100.25,26.75 v1(100.25,29.75) ; 100.25,28.5 115.75,28.5 116.37,29.12 SWD.SWDIO
  Bottom Layer w0.406: v1(100.25,29.75) 101.37,30.87 JTAG.TMS
NewNet34: pad.0@98.75,17.5 U1.PA8-MCO | length 8.4
  Top Layer w0.254: U1.PA8-MCO 96.5,17.5 pad.0@98.75,17.5
NewNet35: pad.0@96.5,15.75 U1.PB14 | length 6.5
  Top Layer w0.254: U1.PB14 95.75,16.5 pad.0@96.5,15.75
NewNet36: pad.0@94.75,15.25 U1.PB13 | length 4.8
  Top Layer w0.254: U1.PB13 94,16 pad.0@94.75,15.25
NewNet37: pad.0@92.964,14.986 U1.PB12 | length 2.9
  Top Layer w0.254: U1.PB12 92.45,15.5 pad.0@92.964,14.986
NewNet38: pad.0@93.5,10.5 U1.PB11 | length 7.9
  Top Layer w0.254: U1.PB11 88,12.5 88.943,11.557 92.443,11.557 93.25,10.75 pad.0@93.5,10.75
NewNet39: pad.0@91.5,10.25 U1.PB10 | length 6.9
  Top Layer w0.254: U1.PB10 87.5,13 87.5,12 88.5,11 89.75,11 90.5,10.25 pad.0@91.5,10.25
NewNet40: pad.0@88.25,9.25 U1.PB1 | length 5.7
  Top Layer w0.254: U1.PB1 86.5,12.75 86.5,11 pad.0@88.25,9.25
NewNet41: pad.0@86.25,9.25 U1.PB0 | length 5.1
  Top Layer w0.254: U1.PB0 86,12.5 86,11.75 86,9.5 pad.0@86.25,9.25
NewNet42: pad.0@84.25,9.25 U1.PA7 | length 5.5
  Top Layer w0.254: pad.0@84.25,9.25 84.25,10.25 85.5,11.5 85.5,12.25 85.5,12.75 U1.PA7
NewNet43: pad.0@82.25,9.25 U1.PA6 | length 6.1
  Top Layer w0.254: pad.0@82.25,9.25 84.25,11.25 85,12 U1.PA6
NewNet44: pad.0@80.091,9.25 U1.PA5 | length 7.4
  Top Layer w0.254: pad.0@80.25,9.25 80.437,9.687 82.5,11.75 83.75,11.75 84.5,12.5 U1.PA5
NewNet45: pad.0@26,14.25 U1.PA4 U2.Latch | length 69.4
  Top Layer w0.254: 80.518,12.319 83.569,12.319 84,12.75 U1.PA4
  Top Layer w0.305: U2.Latch 24.925,17.747 25.654,17.018 pad.0@25.654,14.346
  Top Layer w0.406: pad.0@25.654,14.346 30.729,9.271 77.47,9.271 80.518,12.319
NewNet46: pad.0@28,15 U1.PA3 U2.CLK | length 66.1
  Top Layer w0.254: 80.208,13.208 81.708,13.208 83.312,13.208 83.5,13.396 U1.PA3
  Top Layer w0.305: U2.CLK 25.575,18.24 26.5,17.315 26.5,17 26.5,16.25
  Top Layer w0.406: 26.5,16.25 32.717,10.033 77.033,10.033 80.208,13.208
NewNet47: pad.0@28.5,17.75 U1.PA2 U2.Data | length 62.6
  Top Layer w0.254: 76.545,10.795 77.25,11.5 81.25,15.5 U1.PA2
  Top Layer w0.305: U2.Data 26.225,18.775 27.25,17.75
  Top Layer w0.406: 27.25,17.75 28.25,17.75 35.205,10.795 76.545,10.795
NewNet48: R19.0@31.5,32.282 U1.PA1 U2.PwUp | length 89.4
  Top Layer w0.254: 76.307,11.557 80.75,16 U1.PA1
  Top Layer w0.305: U2.PwUp 25.575,28.075 26.25,28.75 26.25,33.25 27,34
  Top Layer w0.406: 27,34 30.75,34 31.5,33.25 31.5,32.282 31.718,32.5 v1(33.75,32.5) ; v1(32.25,15.75) 36.443,11.557 76.307,11.557
  Bottom Layer w0.406: v1(32.25,15.75) 32.25,23.5 35.5,26.75 35.5,31 34,32.5 v1(33.75,32.5)
NewNet49: pad.0@77.75,15 U1.PA0-WKUP | length 5.1
  Top Layer w0.254: pad.0@77.75,15 78.75,15 80.25,16.5 U1.PA0-WKUP
NewNet50: pad.0@78.105,20.955 U1.PC15-OSC32_OUT | length 4.2
  Top Layer w0.254: 78.486,20.574 79.248,20.574 80.322,19.5 U1.PC15-OSC32_OUT
NewNet51: pad.0@78.232,22.606 U1.PC14-OSC32_IN | length 5.1
  Top Layer w0.254: pad.0@78.232,22.606 78.232,22.479 79.375,21.336 80.711,20 U1.PC14-OSC32_IN
NewNet52: pad.0@80.01,22.225 U1.PC13-Tamper-RTC | length 3.4
  Top Layer w0.254: pad.0@79.883,22.225 79.883,21.59 80.973,20.5 U1.PC13-Tamper-RTC
NewNet53: pad.0@81.647,23.093 U1.VBAT | length 2.9
  Top Layer w0.254: pad.0@81.534,22.86 81.153,22.479 81.153,21.209 81.362,21 U1.VBAT
NewNet54: C17.0@31.5,24.5 U2.IN+ | length 4.9
  Top Layer w0.305: U2.IN+ 27.525,25.225 28.25,24.5 C17.0@31.5,24.5
NewNet55: C23.0@24.5,30.25 U2.VOCM | length 4.6
  Top Layer w0.305: C23.0@24.5,30.25 24.5,28.85 24.925,28.425 U2.VOCM
NewNet56: C18.0@18.25,25 U2.OUT+ | length 6.4
  Top Layer w0.305: C18.0@18.25,25 18.75,24.25 22.5,24.25 22.975,24.725 U2.OUT+
NewNet57: C12.0@31.5,20.782 U2.IN- | length 5.7
  Top Layer w0.305: U2.IN- 27.525,21.275 28,21.75 30.532,21.75 C12.0@31.5,20.782
NewNet58: C13.0@18.25,21.532 U2.OUT- | length 6.3
  Top Layer w0.305: C13.0@18.25,21.532 18.218,21.75 22.5,21.75 22.975,21.275 U2.OUT-
NewNet59: U3.Sign | length 6.4
  Top Layer w0.305: U3.Sign 48.175,33.425 v1@48.25,33.5
  other v1: 48,33.75
NewNet60: C26.0@45.5,32.282 C.0@42.75,32.282 U3.Vin | length 9.7
  Top Layer w0.305: 47.5,31.725 47.525,31.75 U3.Vin
  Top Layer w0.406: C.0@42.75,32.282 45.5,32.282 46.75,32.282 46.993,32.282 47.525,31.75
NewNet61: C17.0@31.5,26.532 C25.0@36.75,30.25 C.0@42.75,30.25 R20.0@39.75,30.25 U3.Iout | length 18.8
  Top Layer w0.305: C.0@42.75,30.25 42.75,29.25 43.25,28.75 45.75,28.75 46.225,28.275 U3.Iout
  Top Layer w0.406: C17.0@31.5,26.532 33.032,26.532 36.75,30.25 39.75,30.25 C.0@42.75,30.25
NewNet62: C12.0@31.5,18.75 C15.0@39.25,25.032 R13.0@42.25,25.032 U3.IoutB | length 19.9
  Top Layer w0.305: C15.0@39.25,25.032 42.25,25.032 44.782,25.032 45.575,25.825 U3.IoutB
  Top Layer w0.406: C12.0@31.5,18.75 32.974,18.75 33.655,19.431 33.655,22.225 36.462,25.032 C15.0@39.25,25.032
NewNet63: C8.0@54,17.532 U3.Cap | length 7.6
  Top Layer w0.305: U3.Cap 48.825,19.925 49.718,19.032 52.5,19.032 C8.0@54,17.532
NewNet64: C6.0@45,15.5 C7.0@48,17.532 R7.0@51,17.532 U3.AVdd U3.DVdd | length 15.3
  Top Layer w0.305: C6.0@45,15.5 46.25,15.5 46.5,15.75 46.5,17.25 46.782,17.532 48,17.532 48.175,17.857 C7.0@48.175,18 ; U3.AVdd 47.525,18.65 C7.0@48.175,18 ; U3.DVdd C7.0@48.175,18
  Top Layer w0.406: C7.0@48,17.532 R7.0@51,17.532
NewNet65: C6.0@45,17.532 U3.Comp | length 4.6
  Top Layer w0.305: C6.0@45,17.532 46.875,19.407 U3.Comp
NewNet66: C5.0@42,17.532 U3.RefOut | length 6.6
  Top Layer w0.305: C5.0@42,17.532 43.968,19.5 45.75,19.5 46.225,19.975 U3.RefOut
NewNet67: C4.0@39,17.532 R5.0@36,17.532 U3.Fadj | length 11.8
  Top Layer w0.305: R5.0@36,17.532 39,17.532 39,17.75 41.5,20.25 45.25,20.25 45.575,20.575 U3.Fadj
NewNet68: OSC1.Out R6.0@57.5,17.532 | length 4.8
  Top Layer w0.406: OSC1.Out 56.15,20.35 57.5,19 R6.0@57.5,17.532
NewNet69: OUT1.1 pad.2 | length 3.6
  Bottom Layer w0.508: pad.2 10.16,37.584 OUT1.1
NewNet70: OUT1.2 pad.1 | length 3.4
  Bottom Layer w0.508: pad.1 14.15,37.137 OUT1.2
NewNet71: OUT1.3 pad.0@19.685,39.243 | length 3.1
  Bottom Layer w0.508: OUT1.3 16.899,39.243 pad.0@19.685,39.243
NewNet72: pad.0@83.806,26.014 U1.PB9 | length 4
  Top Layer w0.254: pad.0@83.82,26.035 84.5,25.355 U1.PB9
NewNet73: JTAG.11 pad.0@105.799,34.681 | length 2.3
  Top Layer w0.406: pad.0@105.799,34.681 106.45,35.332 JTAG.11
pads on no net: JTAG.17 JTAG.19 USB1.6 USB1.7

## Polygon pours and split planes (outlines as drawn)
GND on Bottom Layer "gnd_poly" (solid, remove dead copper, pour order 2): 7.75,7.75 7.75,41.75 127.75,41.75 127.75,7.75 126.25,7.75 125.75,7.75 7.75,7.75

## Keep-outs
Keep-Out Layer:
  lines w0.254: 7.75,7.75 7.75,41.75 128,41.75 128,7.75 7.75,7.75

## Silkscreen, mask and mechanical layers (free items; w line width, h text height)
Top Overlay:
  text "TP1" at 80.518,10.16 h0.76 r90
  text "TP3" at 84.836,10.16 h0.76 r90
  text "TP4" at 86.487,10.16 h0.76 r90
  text "TP5" at 88.519,10.16 h0.76 r90
  text "TP2" at 82.728,10.109 h0.76 r90

## Text inside footprints (layer, text, board x,y; h text height)
JTAG: Top Overlay "1" at 91.21,36.242 h1.27